# EAGLE board mcu (EAGLE 6.4)
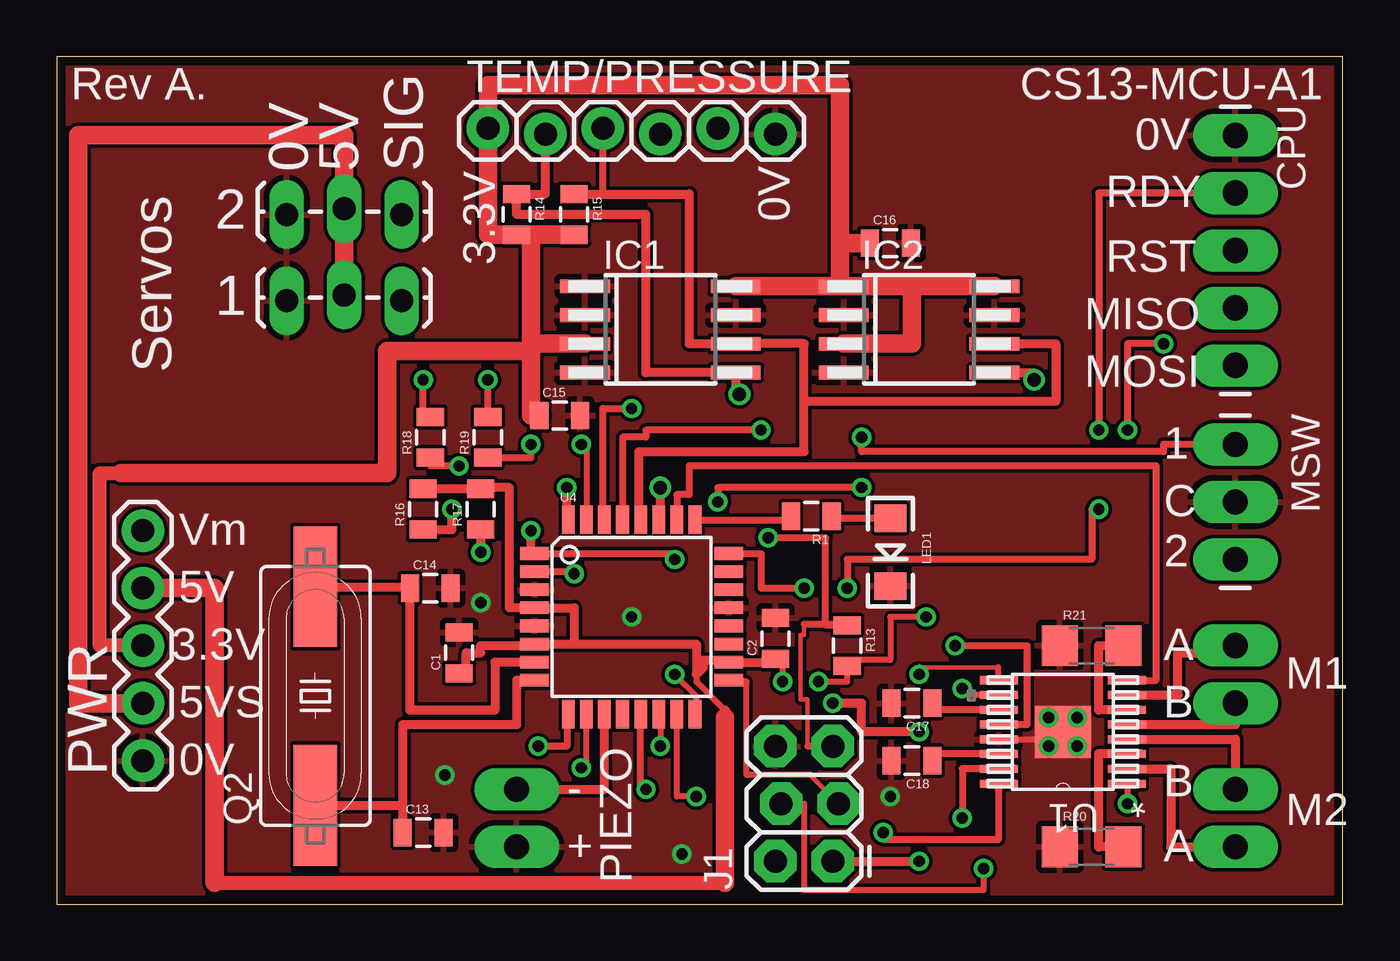
[diagram p0: board, top side]
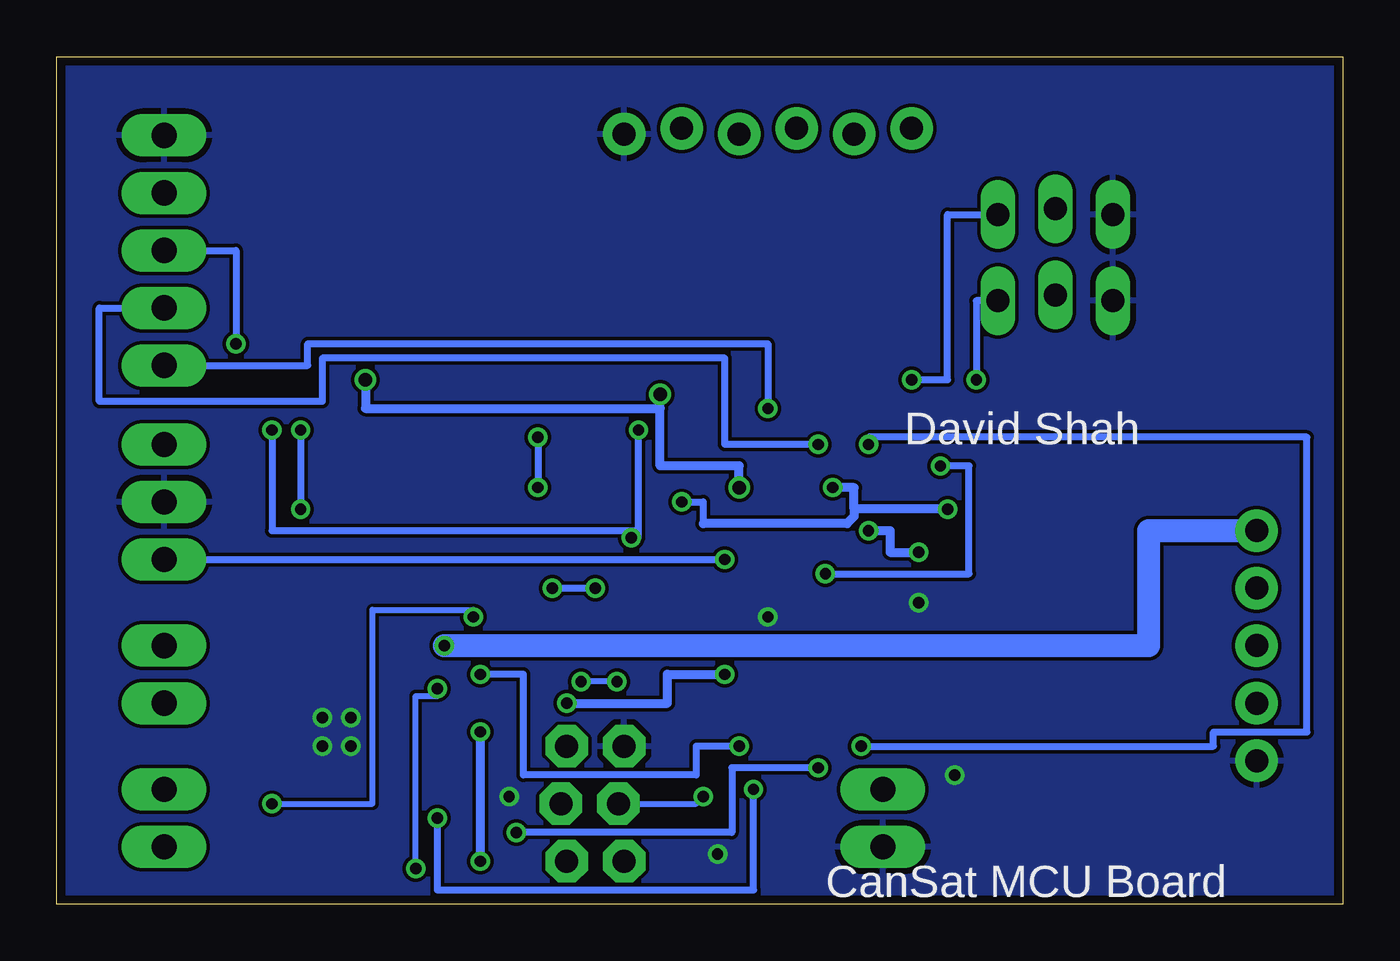
[diagram p1: board, bottom side, seen from below]

Size 56.82 x 37.45 mm. Coordinates in mm from the lower left corner, seen from the top.
Outline: 0,0 56.82,0 56.82,37.45 0,37.45 0,0
Copper layers (1*16): Top 0.0356mm / dielectric 1.5011mm / Bottom 0.0356mm
Design rules "LaenPCBOrder *": minimum track width 6mil, minimum drill 13mil, track to track 6mil, track to pad 6mil, pad to pad 6mil, via to via 6mil, smd to smd 6mil, copper to edge 15mil, drill to drill 6mil, minimum pad ring 7mil, minimum via ring 7mil, stop-mask expansion 4mil, vias tented up to drill 28mil, thermal gap 10mil

## Footprints (pad centres in the part's own frame; a part is rotated, then mirrored left to right if it is on the bottom)
0805 = smd 0.8 x 1.2: 1 -0.9,0; 2 0.9,0
1X05_LONGPADS = drill 1.118 pad 1.88 long: 1 0,0; 2 2.54,0; 3 5.08,0; 4 7.62,0; 5 10.16,0
SO-08M = smd 0.6 x 2.2: 1 -1.905,-3.33; 2 -0.635,-3.33; 3 0.635,-3.33; 4 1.905,-3.33; 5 1.905,3.33; 6 0.635,3.33; 7 -0.635,3.33; 8 -1.905,3.33
2X3_LOCK = drill 1.016 pad 1.88 octagon: 1 0,0; 2 0,2.54; 3 2.54,-0.254; 4 2.54,2.286; 5 5.08,0; 6 5.08,2.54
1X02_LONGPADS = drill 1.118 pad 1.88 long: 1 0,0; 2 2.54,0
1X03_LOCK_LONGPADS = drill 1.016 long: 1 0,0; 2 2.54,-0.254; 3 5.08,0
LED-1206 = smd 1.2 x 1.4: A -1.5,0; C 1.5,0
1X05 = drill 1.016 pad 1.88: 1 0,0; 2 2.54,0; 3 5.08,0; 4 7.62,0; 5 10.16,0
1X03_LONGPADS = drill 1.118 pad 1.88 long: 1 0,0; 2 2.54,0; 3 5.08,0
HC49UP = smd 5.334 x 1.93: 1 -4.826,0; 2 4.826,0
1206 = smd 1.6 x 1.8: 1 -1.4,0; 2 1.4,0
1X06_LOCK = drill 1.016 pad 1.88: 1 0,0; 2 2.54,-0.254; 3 5.08,0; 4 7.62,-0.254; 5 10.16,0; 6 12.7,-0.254
PWP16_2P31X2P46 = smd 1.676 x 0.356: 1 -2.819,2.286; 2 -2.819,1.626; 3 -2.819,0.965; 4 -2.819,0.33; 5 -2.819,-0.33; 6 -2.819,-0.965; 7 -2.819,-1.626; 8 -2.819,-2.286; 9 2.819,-2.286; 10 2.819,-1.626; 11 2.819,-0.965; 12 2.819,-0.33; 13 2.819,0.33; 14 2.819,0.965; 15 2.819,1.626; 16 2.819,2.286 | smd 2.464 x 2.311: EPAD 0,0
TQFP32-08 = smd 1.27 x 0.559: 1 -4.293,2.8; 2 -4.293,2; 3 -4.293,1.2; 4 -4.293,0.4; 5 -4.293,-0.4; 6 -4.293,-1.2; 7 -4.293,-2; 8 -4.293,-2.8; 17 4.293,-2.8; 18 4.293,-2; 19 4.293,-1.2; 20 4.293,-0.4; 21 4.293,0.4; 22 4.293,1.2; 23 4.293,2; 24 4.293,2.8 | smd 0.559 x 1.27: 9 -2.8,-4.293; 10 -2,-4.293; 11 -1.2,-4.293; 12 -0.4,-4.293; 13 0.4,-4.293; 14 1.2,-4.293; 15 2,-4.293; 16 2.8,-4.293; 25 2.8,4.293; 26 2,4.293; 27 1.2,4.293; 28 0.4,4.293; 29 -0.4,4.293; 30 -1.2,4.293; 31 -2,4.293; 32 -2.8,4.293

## Placement (x,y rotation side)
C1  1uF  [0805]  17.78,11.11 90 top
C2  1uF  [0805]  31.75,11.75 90 top
C13  18p  [0805]  16.19,3.17 0 top
C14  18p  [0805]  16.51,13.97 0 top
C15  1u  [0805]  22.23,21.59 0 top
C16  1u  [0805]  36.83,29.21 0 top
C17  0.01u  [0805]  37.78,8.89 180 top
C18  2.2u  [0805]  37.78,6.35 180 top
CPU  [1X05_LONGPADS]  52.07,33.97 270 top
IC1  24LC128SM  [SO-08M]  26.67,25.4 270 top
IC2  24LC128SM  [SO-08M]  38.1,25.4 270 top
J1  AVR_SPI_PRG_62X3_LOCK  [2X3_LOCK]  34.29,1.91 90 top
JP1  [1X02_LONGPADS]  20.32,5.08 270 top
JP2  [1X03_LOCK_LONGPADS]  15.24,26.67 180 top
JP3  [1X03_LOCK_LONGPADS]  15.24,30.48 180 top
LED1  [LED-1206]  36.83,15.56 270 top
M1  [1X02_LONGPADS]  52.07,2.54 90 top
M2  [1X02_LONGPADS]  52.07,11.43 270 top
MCU_PWR  [1X05]  3.81,6.35 90 top
MSW  [1X03_LONGPADS]  52.07,20.32 270 top
Q2  16M  [HC49UP]  11.43,9.21 90 top
R1  330  [0805]  33.34,17.14 180 top
R13  100k  [0805]  34.92,11.43 270 top
R14  2.2k  [0805]  20.32,30.48 270 top
R15  2.2k  [0805]  22.86,30.48 270 top
R16  10k  [0805]  16.19,17.46 90 top
R17  10k  [0805]  18.73,17.46 90 top
R18  100  [0805]  16.51,20.64 90 top
R19  100  [0805]  19.05,20.64 90 top
R20  0.1  [1206]  45.72,2.54 0 top
R21  0.1  [1206]  45.72,11.43 0 top
TPS  [1X06_LOCK]  19.05,34.29 0 top
U1  DRV8833_PWP_16  [PWP16_2P31X2P46]  44.45,7.62 180 top
U4  ATMEGA328P  [TQFP32-08]  25.4,12.7 0 top

## Library data of the parts
C1 C2 = SparkFun-Capacitors; PROD_ID: CAP-08064
C13-C18 R1 R13-R21 = SparkFun-Passives
CPU J1 JP1-JP3 M1 M2 MCU_PWR MSW TPS = SparkFun-Connectors
IC1 IC2 = microchip; MF: MICROCHIP; MPN: 24LC128-I/SM; OC_FARNELL: 9757937; OC_NEWARK: 92C7134
LED1 = SparkFun-LED
Q2 = crystal; OC_FARNELL: unknown; OC_NEWARK: unknown
U1 = L5973D; DATASHEETURL: http://www.ti.com/lit/gpn/DRV8833; DESCRIPTION: 2A Low Voltage Dual Brushed DC or Single Bipolar Stepper Motor Driver (PWM Ctrl); FAMILY_NAME: BRUSHED DC DRIVER; GENERIC_PART_NUMBER: DRV8833; INDUSTRY_STD_PKG_TYPE: HTSSOP; MANUFACTURER: Texas Instruments; MANUFACTURER_PART_NUMBER: drv8833_pwp_16; PACKAGE_DESIGNATOR: PWP; PIN_COUNT: 16; VENDOR: Texas Instruments
U4 = SparkFun-DigitalIC; PROD_ID: IC-09069

## Nets
3.3V: C15.1 C16.1 IC1.3 IC1.8 IC2.1 IC2.3 IC2.8 MCU_PWR.3 R14.2 R15.2 TPS.1
5V: C1.1 C2.1 MCU_PWR.4 R13.2 R16.2 R17.2 U1.1 U4.4 U4.6 U4.18
5VS: JP2.2 JP3.2 MCU_PWR.2
FLT: U1.8 U4.26
GND: C1.2 C2.2 C13.2 C14.2 C15.2 C16.2 C17.2 C18.2 CPU.1 IC1.1 IC1.2 IC1.4 IC1.7 IC2.2 IC2.4 IC2.7 J1.6 JP1.2 JP2.3 JP3.3 LED1.C MCU_PWR.1 MSW.2 R20.1 R21.1 TPS.6 U1.13 U1.EPAD U4.3 U4.5 U4.21
LNK_MISO: CPU.4 U4.31
LNK_MOSI: CPU.5 U4.30
M1A: M1.1 U1.2
M1A_CTL: U1.16 U4.10
M1B: M1.2 U1.4
M1B_CTL: U1.15 U4.13
M2A: M2.1 U1.7
M2A_CTL: U1.9 U4.14
M2B: M2.2 U1.5
M2B_CTL: J1.4 U1.10 U4.15
N$1: LED1.A R1.1
N$17: JP2.1 R18.2
N$18: J1.3 U4.17
N$19: J1.1 U4.16
N$20: JP3.1 R19.2
N$21: C17.1 U1.11
N$23: C18.1 U1.14
N$24: R21.2 U1.6
N$25: R20.2 U1.3
PIEZO: JP1.1 U4.11
RDY: CPU.2 U4.24
RST: CPU.3 J1.5 R13.1 U4.29
SCL: IC1.6 IC2.6 R15.1 TPS.3 U4.28
SDA: IC1.5 IC2.5 R14.1 TPS.2 U4.27
SERVO1: R18.1 U4.2
SERVO2: R19.1 U4.9
STAT: R1.2 U4.25
SW1: MSW.1 R16.1 U4.32
SW2: MSW.3 R17.1 U4.1
V_BATT: MCU_PWR.5 U1.12
XTAL1: C14.1 Q2.2 U4.7
XTAL2: C13.1 Q2.1 U4.8

## Tracks (layer width: path | path; a pad name or v marks a point on that pad's centre or on a via)
3.3V
  Top 0.61: MCU_PWR.3 1.91,11.43 1.91,19.05 2.86,19.05
  Top 0.813: 20.95,29.58 R14.2 19.05,29.58 TPS.1 19.05,36.2 34.61,36.2 34.61,29.53 34.61,29.21 | 20.95,29.58 R15.2 | IC1.3 20.95,24.77 | 20.95,24.77 20.95,29.58 | IC2.1 IC1.8 34.61,27.3 34.61,29.21 | IC2.1 37.78,27.3 | 37.78,27.3 IC2.8 | IC2.3 37.78,24.77 37.78,27.3 | IC2.1 34.66,27.3 | 2.86,19.05 14.61,19.05 14.61,24.45 20.95,24.45 | 20.95,24.45 20.95,24.77 | C15.1 20.95,21.59 20.95,24.45 | C16.1 34.61,29.21
5V  (via drill 0.5)
  Top 0.254: 28.26,10.16 28.26,9.84 29.53,8.57 | U1.1 47.31,5.33 v47.31,4.45 | v38.42,12.7 36.83,12.7 36.83,10.79 34.92,10.79 R13.2 34.92,9.84 v33.66,9.84 | C2.1 32.07,10.85 v32.07,9.84
  Top 0.406: 29.53,8.26 29.53,8.57 | C2.1 31.75,10.7 U4.18 29.6,10.79 28.57,10.79 28.57,10.48 28.26,10.16 28.26,11.5 22.86,11.5 | 22.86,11.5 U4.6 21.11,11.43 18.73,11.43 18.73,11.11 18.1,11.11 18.1,10.21 C1.1 | R16.2 R17.2 18.73,18.41 20,18.41 20,13.1 U4.4 22.86,13.1 22.86,11.5
  Top 0.61: 6.99,0.95 29.53,0.95
  Top 0.813: MCU_PWR.4 6.99,13.97 6.99,0.95 | 29.53,0.95 29.53,8.26
  Bottom 0.254: v47.31,4.45 42.86,4.45 42.86,13.02 38.42,13.02 v38.42,12.7 | v32.07,9.84 v33.66,9.84
5VS
  Top 0.813: MCU_PWR.2 0.95,8.89 0.95,33.97 12.7,33.97 JP3.2 JP2.2
FLT
  Top 0.305: U1.8 48.58,9.91 48.58,19.37 27.94,19.37 27.94,18.1 27.4,18.1 U4.26
GND  (via drill 0.5)
  Top 0.254: U1.13 44.45,7.29 U1.EPAD
  other vias: 18.73,13.34 17.14,5.71 27.62,2.22 25.4,12.7 36.83,4.76 43.81,8.26 45.09,8.26 43.81,6.99 45.09,6.99
  pour Top: -0.64,38.1 -1.91,38.1 -1.91,-1.27 58.1,-1.27 58.1,38.1
  pour Bottom: -2.86,38.73 -3.81,38.73 -3.81,-1.91 59.69,-1.91 59.69,38.73
  pour Top (no thermals): 42.86,10.16 42.86,4.76 46.04,4.76 46.04,9.84 46.04,10.16
LNK_MISO  (via drill 0.5)
  Top 0.254: v23.18,20.32 23.4,20.32 U4.31
  Top 0.305: U4.31 23.5,16.99
  Bottom 0.305: v23.18,20.32 27.3,20.32 27.3,24.13 45.09,24.13 45.09,22.23 54.93,22.23 54.93,26.35 CPU.4
LNK_MOSI  (via drill 0.5)
  Top 0.305: U4.30 24.13,16.99 24.13,21.91 v25.4,21.91
  Bottom 0.305: CPU.5 45.72,23.81 45.72,24.77 25.4,24.77 v25.4,21.91
M1A
  Top 0.406: U1.2 49.21,5.99 49.21,2.54 M1.1
M1A_CTL  (via drill 0.5)
  Top 0.254: v23.18,6.03 23.4,6.03 U4.10
  Top 0.305: U1.16 41.59,5.33 41.59,2.86 36.51,2.86 v36.51,3.17
  Bottom 0.305: v23.18,6.03 26.99,6.03 26.99,3.17 v36.51,3.17
M1B
  Top 0.406: U1.4 52.07,7.29 M1.2
M1B_CTL  (via drill 0.5)
  Top 0.305: U1.15 40.01,5.99 v40.01,3.81 | v26.04,5.08 25.8,5.08 U4.13
  Bottom 0.305: v40.01,3.81 40.01,0.64 26.04,0.64 v26.04,5.08
M2A
  Top 0.406: U1.7 49.53,9.25 49.53,11.11 52.07,11.11 M2.1
M2A_CTL  (via drill 0.5)
  Top 0.203: 38.1,10.48 41.59,10.48
  Top 0.254: 26.67,8.41 v26.67,6.99 | U1.9 41.59,9.91 41.59,10.48 | 38.1,10.48 v38.1,10.16
  Top 0.305: U4.14 26.67,8.41
  Bottom 0.305: v26.67,6.99 28.57,6.99 28.57,5.71 36.2,5.71 36.2,10.16 v38.1,10.16
M2B
  Top 0.406: U1.5 52.07,7.95 M2.2
M2B_CTL  (via drill 0.5)
  Top 0.254: v28.26,4.76 27.4,4.76 U4.15 | J1.4 33.02,4.45 33.02,0.64 40.96,0.64 v40.96,1.59 | U1.10 40.01,9.25 v40.01,9.53
  Bottom 0.254: J1.4 28.57,4.45 v28.26,4.76 | v40.96,1.59 40.96,9.21 40.01,9.21 v40.01,9.53
N$1
  Top 0.305: LED1.A 34.24,17.06 R1.1
N$17  (via drill 0.5)
  Top 0.305: R18.2 16.19,21.54 v16.19,23.18
  Bottom 0.305: JP2.1 16.19,26.67 v16.19,23.18
N$18
  Top 0.203: 33.34,5.71 33.34,5.65 J1.3
  Top 0.254: 33.34,5.71 30.48,5.71 30.48,9.84 29.69,9.84 U4.17
N$19  (via drill 0.5)
  Top 0.254: 28.26,8.41 28.26,9.21 v27.3,10.16
  Top 0.406: J1.1 v38.1,1.91 | v38.1,7.62 35.56,7.62 35.56,8.89 v34.29,8.89 | U4.16 28.26,8.41
  Bottom 0.406: v38.1,1.91 v38.1,7.62 | v34.29,8.89 29.84,8.89 29.84,10.16 v27.3,10.16
N$20  (via drill 0.5)
  Top 0.305: R19.2 v19.05,23.18
  Bottom 0.305: v19.05,23.18 17.46,23.18 17.46,30.48 JP3.1
N$21
  Top 0.305: U1.11 39,8.59 C17.1
N$23
  Top 0.305: U1.14 39,6.66 C18.1
N$24
  Top 0.406: U1.6 46.04,8.59 46.04,11.43 R21.2
N$25
  Top 0.406: R20.2 46.04,2.54 46.04,6.67 47.9,6.67 U1.3
PIEZO
  Top 0.406: JP1.1 24.2,5.08 U4.11
RDY  (via drill 0.5)
  Top 0.305: CPU.2 46.04,31.43 v46.04,20.95 | v46.04,17.46 45.72,17.46 45.72,15.24 34.92,15.24 v34.92,13.97 | U4.24 31.11,15.5 31.11,13.97 v33.02,13.97
  Bottom 0.305: v46.04,20.95 v46.04,17.46 | v34.92,13.97 v33.02,13.97
RST  (via drill 0.5)
  Top 0.203: 33.02,12.38 33.02,11.91 32.86,11.91 32.86,9.05 33.18,9.05 33.18,6.99
  Top 0.305: J1.5 33.18,6.99 | 33.02,12.38 34.29,12.38 R13.1 33.97,12.33 33.97,16.19 v31.43,16.19 | v31.11,20.95 26.04,20.95 26.04,20.64 25,20.64 U4.29 | v48.9,24.77 47.31,24.77 v47.31,20.95
  Bottom 0.305: v31.43,16.19 31.11,16.19 31.11,16.51 | 31.11,16.51 v31.11,20.95 | CPU.3 48.9,28.89 v48.9,24.77 | v47.31,20.95 47.31,16.51 31.11,16.51
SCL
  Top 0.305: R15.1 24.13,31.38 TPS.3
  Top 0.406: IC2.6 44.13,24.77 44.13,22.23 33.02,22.23 | 33.02,22.23 33.02,24.77 IC1.6 27.94,24.77 27.94,31.38 R15.1 | U4.28 25.72,16.99 25.72,20 33.02,20 33.02,22.23
SDA  (via drill 0.6)
  Top 0.406: TPS.2 21.59,31.38 R14.1 20.32,30.48 26.04,30.48 26.04,23.5 IC1.5 30,22.54 v30.16,22.54 | IC2.5 43.18,23.5 v43.18,23.18 | U4.27 26.67,16.99 v26.67,18.41
  Bottom 0.406: v43.18,23.18 43.18,21.91 30.16,21.91 | 30.16,21.91 v30.16,22.54 | v26.67,18.41 26.67,19.37 30.16,19.37 30.16,21.91
SERVO1  (via drill 0.5)
  Top 0.305: U4.2 22.86,14.7 v22.86,14.61 | v17.78,19.37 16.51,19.37 R18.1
  Bottom 0.305: v22.86,14.61 16.51,14.61 16.51,19.37 v17.78,19.37
SERVO2  (via drill 0.5)
  Top 0.305: U4.9 22.54,8.41 22.54,6.99 v21.27,6.99 | R19.1 20.95,19.74 v20.95,20.32
  Bottom 0.305: v21.27,6.99 5.71,6.99 5.71,7.62 1.59,7.62 1.59,20.64 20.95,20.64 v20.95,20.32
STAT
  Top 0.305: U4.25 32.44,16.99 R1.2
SW1  (via drill 0.5)
  Top 0.305: MSW.1 48.9,20.32 48.9,20 35.56,20 v35.56,20.64 | v35.56,18.41 29.21,18.41 v29.21,17.78
  Top 0.406: R16.1 17.46,16.56 v17.46,17.46 | U4.32 22.54,16.99 v22.54,18.41
  Bottom 0.305: v35.56,20.64 v35.56,18.41 | v29.21,17.78 28.26,17.78 28.26,16.83
  Bottom 0.406: v17.46,17.46 21.59,17.46 | 21.59,17.46 21.59,18.41 v22.54,18.41 | 21.59,17.46 21.59,17.14 21.91,16.83 28.26,16.83
SW2  (via drill 0.5)
  Top 0.305: U4.1 27.3,15.5 v27.3,15.24
  Top 0.406: U4.1 20.95,15.5 v20.95,16.51 | R17.1 v18.73,15.56
  Bottom 0.305: MSW.3 v27.3,15.24
  Bottom 0.406: v20.95,16.51 20,16.51 20,15.56 v18.73,15.56
V_BATT  (via drill 0.5)
  Top 0.305: v39.69,11.43 42.86,11.43 42.86,7.94 41.63,7.94 U1.12
  Bottom 1.016: v39.69,11.43 8.57,11.43 8.57,16.51 MCU_PWR.5
XTAL1
  Top 0.406: Q2.2 15.61,14.03 C14.1 15.61,8.57 19.37,8.57 19.37,10.7 U4.7
XTAL2
  Top 0.406: Q2.1 15.29,4.38 | U4.8 20.32,9.9 20.32,7.94 15.29,7.94 15.29,4.38 | 15.29,4.38 C13.1

## Text on the board
tNames: Rev A. | TEMP/PRESSURE | CS13-MCU-A1 | 0V | 0V | 5V | SIG | RDY | 2 | 0V | 3.3V | RST | 1 | MISO | Servos | MOSI | 1 | C | Vm | 2 | 5V | 3.3V | A | M1 | 5VS | B | PWR | 0V | B | - | M2 | + | A | PIEZO
bNames: David Shah | CanSat MCU Board